# Altium PCB 5VPS.PcbDoc
Units mil, origin at the board's own origin, x right, y up, seen from the top; angles counter-clockwise.
Board outline 1875 x 2397.17 mil, 2 copper layers (Top Layer, Bottom Layer (GND)); 13 components, 6 nets, 31 pads, 8 vias.
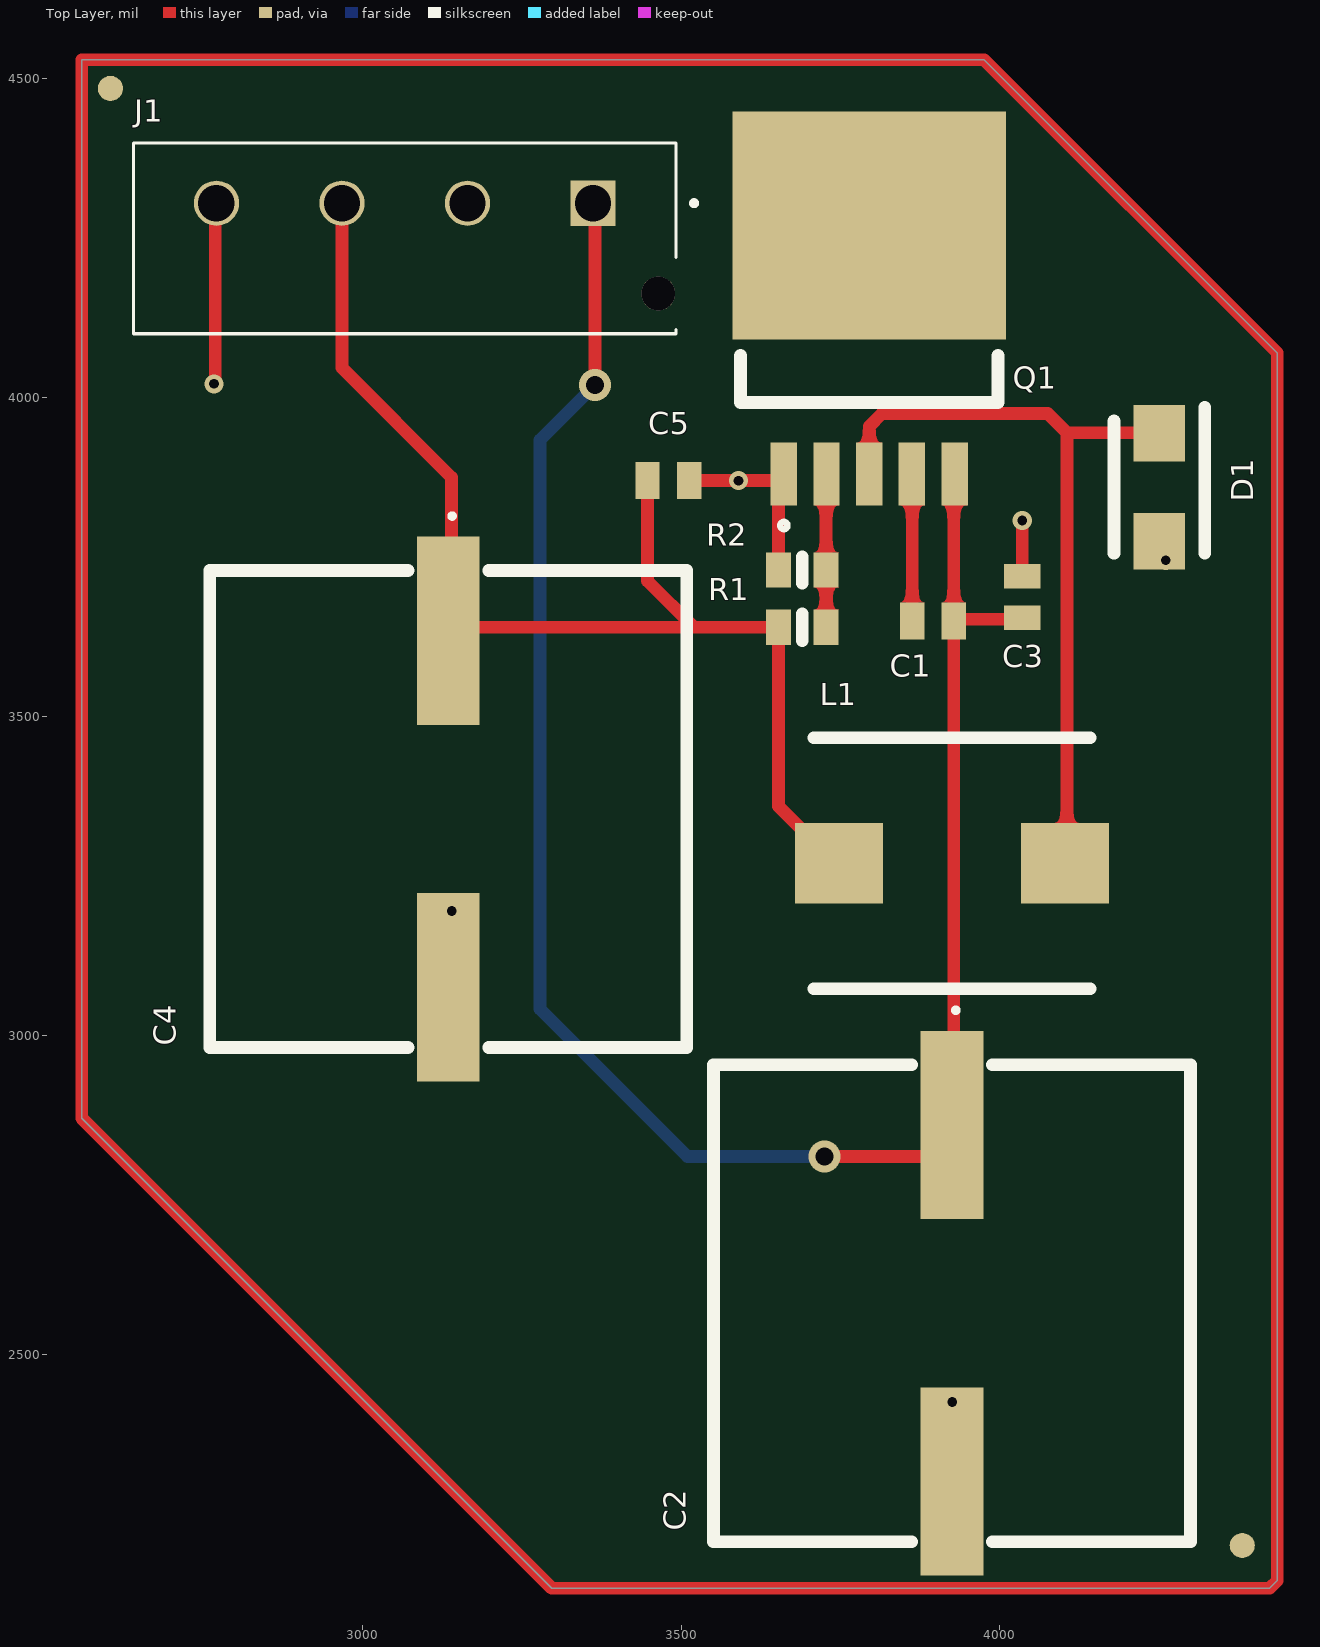
[diagram p0: Top Layer view]
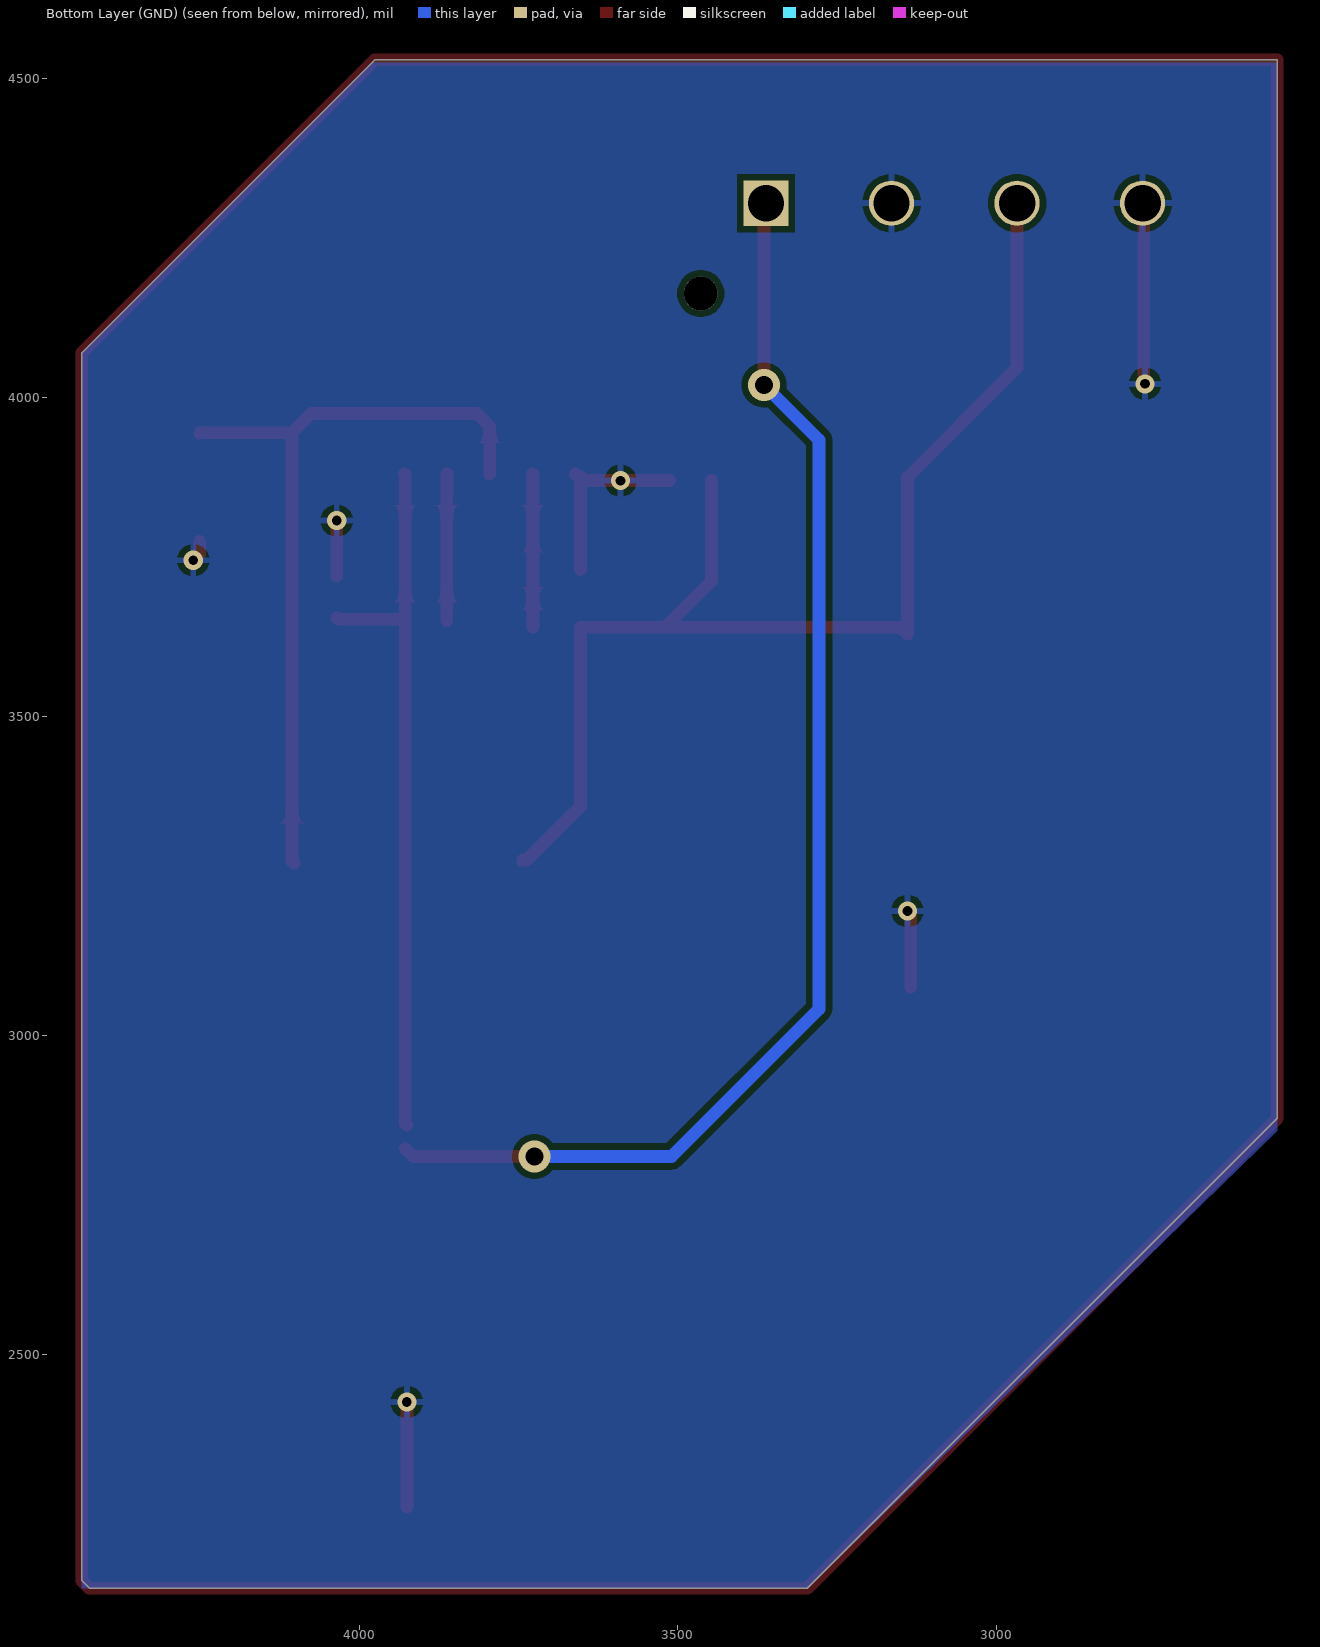
[diagram p1: Bottom Layer (GND) view, seen from below]
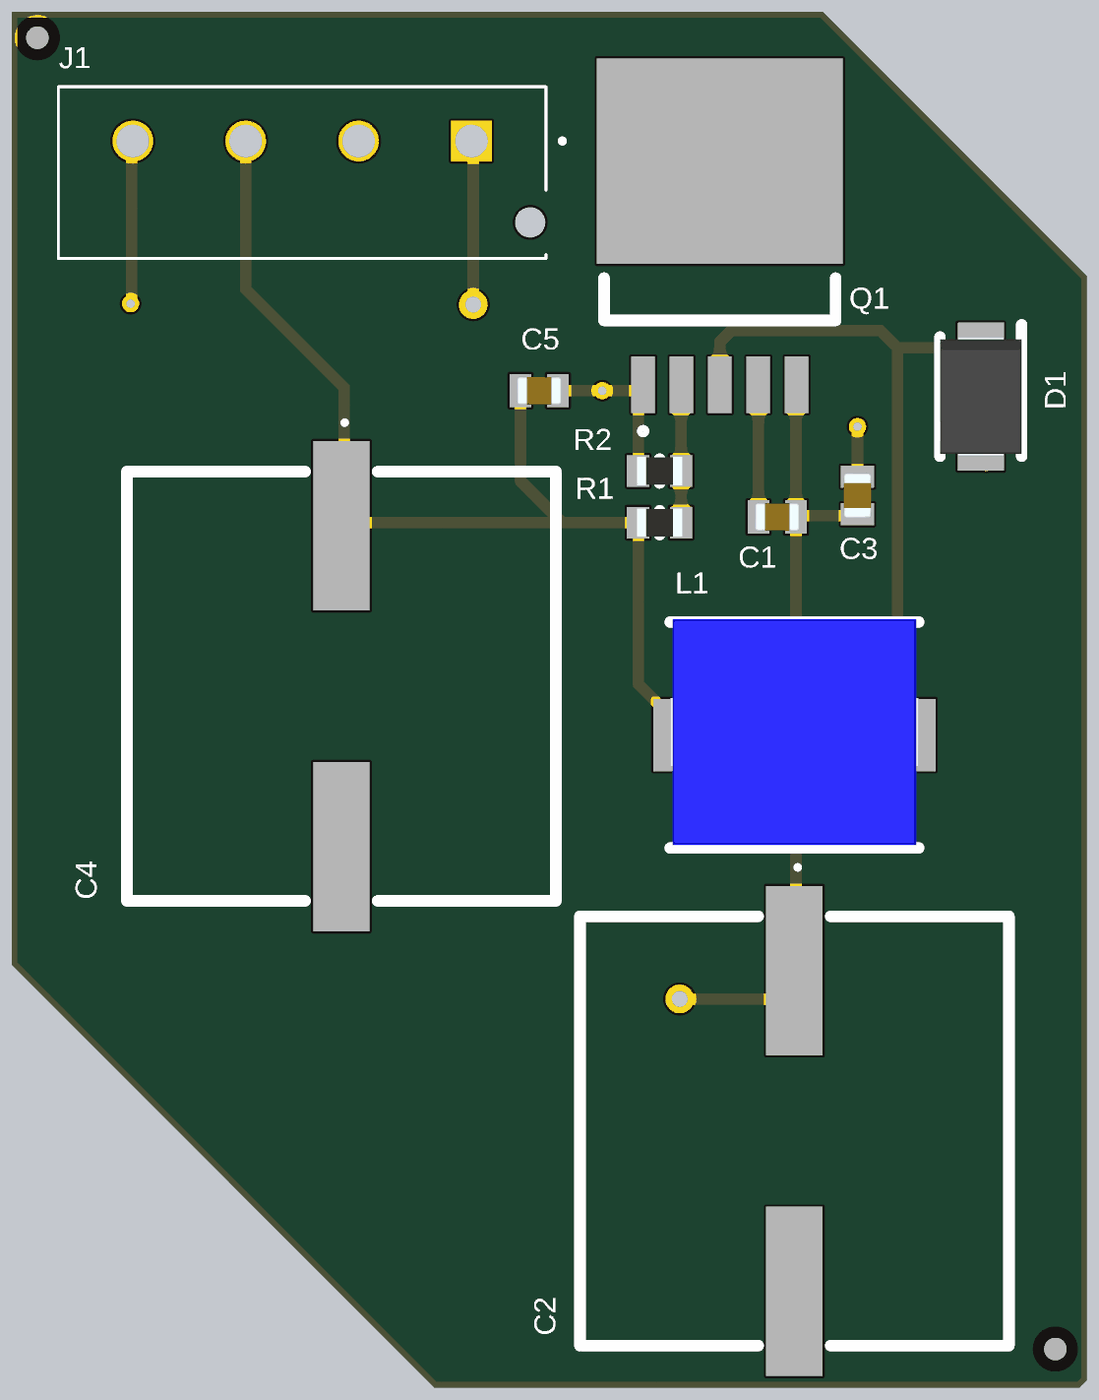
[diagram p2: 3D render of the assembled board from above, using the file's embedded part models]

## Layer stack, top to bottom
Top Solder: solder mask 0.4, Solder Resist, Dk 3.5
Top Layer: signal copper 1.378
Dielectric 1: dielectric 12.6, FR-4, Dk 4.8
Bottom Layer (GND): signal copper 1.378
Bottom Solder: solder mask 0.4, Solder Resist, Dk 3.5

## Board outline
2560,2870 3297.17,2132.83 4422.83,2132.83 4435,2145 4435,4070 3975,4530 2560,4530

## Design rules (kind name [scope] priority, off if disabled: settings)
Clearance [All] p1: gap=10 ignorepadtopadclearanceinfootprint=FALSE except(0: Arc-Hole Track-Hole SMDPad-Hole THPad-Hole Via-Hole Fill-Hole Poly-Hole Region-Hole Text-Hole)
PolygonConnect [All] p1: connectstyle=Relief reliefconductorwidth=10 reliefentries=4 polygonreliefangle="90 Angle" airgapwidth=10
RoutingVias [All] p1: holewidth=28 width=50 viastyle="Through Hole" minholewidth=28 minwidth=50 maxholewidth=28 maxwidth=50
SilkToSolderMaskClearance [IsText] p1: minsilkscreentomaskgap=10 clearancetoexposedcopper=TRUE
SolderMaskExpansion [All] p1: expansion=4 istentingtop=FALSE
Width [All] p1: maxlimit=35 minlimit=10 preferedwidth=10
29 further rules are at their usual default settings.

## Classes and differential pairs
component class 5VPS: C1 C2 C3 C4 C5 D1 J1 L1 Q1 R1 R2

## Components (designator, comment, footprint, x,y, rotation, side; value= is the part's Value field where it differs from the comment)
C1 "1uF" CAPC2012X145N 3895,3650 r0 top
C2 "220uF" FKV(K16) 3925,2580 r270 top
C3 "1uF" CAPC2012X145N 4035,3687.32 r270 top
C4 "220uF" FKV(K16) 3135,3355 r270 top
C5 "1uF" CAPC2012X145N 3480,3870 r180 top
D1 "SS54B" DIOM5336X244N 4250,3859.65 r270 top
J1 "1376384-1" TE_1376384-1 3361.85,4305 r180 top
L1 "47uH" INDPM110100X400N 3925,3270 r180 top
Q1 "XL4015" TO-263-5 3795,4352.68 r0 top
R1 "10k" RESC2012X65N 3690,3640 r180 top
R2 "3k3" RESC2012X65N 3690,3730 r0 top
? "Comment" FIDUCIAL 2605,4485 r0 top
? "Comment" FIDUCIAL 4380,2200 r0 top

## Footprints (in the part's own frame and the unit in brackets; to place one, negate y for a bottom-side part, rotate by r counter-clockwise, add the part's x,y. Pads: shape width x height; smd on the part's side, far side on the other; paste and mask are expansions set on the pad)
CAPC2012X145N [mm]
  rect 0.97x1.47 smd: 1(-0.83,0) 2(0.83,0)
  body extent -1,-0.63 1,0.62, height 1.45
DIOM5336X244N [mm]
  rect 2.25x2.05 smd: 1(-2.15,0) 2(2.15,0)
  silkscreen extent -3.18,-1.81 2.64,1.81, body extent -2.64,-1.81 2.64,1.81, height 2.44
FIDUCIAL [mm] "FIDUCIAL 1mm SOLDER MASK 2mm KEEP OUT 2mm"
  round 1 smd mask+0.5: 0(0,0)
FKV(K16) [mm]
  rect 7.5x2.5 smd: 1(-7.1,0) 2(7.1,0)
  silkscreen extent -11.75,-9.5 9.5,9.5
INDPM110100X400N [mm]
  rect 3.5x3.2 smd: 1(-4.5,0) 2(4.5,0)
  silkscreen extent -5.5,-5 5.5,5, body extent -5.5,-5.13 5.5,4.87, height 4
RESC2012X65N [mm]
  rect 1x1.4 smd: 1(-0.95,0) 2(0.95,0)
  silkscreen extent 0,-0.53 0,0.53, body extent -1,-0.62 1,0.62, height 0.65
TE_1376384-1 [mm]
  rect 1.8x1.8 hole 1.45: 1(0,0)
  round 1.8 hole 1.45: 2(5,0) 3(10,0) 4(15,0)
  round 1.35 hole 1.35 unplated: ""(-2.6,3.6)
  silkscreen extent -4.13,-2.4 18.3,5.2
TO-263-5 [mm]
  rect 1.05x2.5 smd: 1(-3.4,-12) 2(-1.7,-12) 3(0,-12) 4(1.7,-12) 5(3.4,-12)
  rect 10.9x9.1 smd: 6(0,-2.1)
  silkscreen extent -5.13,-14.19 5.13,-7.28

## Part data
C1 C3 C5: library part GRM21BR71H104JA01L, "Multilayer Ceramic Capacitors MLCC - SMD/SMT 0805 0.1uF 50volts X7R 5%", Manufacturer_Name="Murata Electronics", Arrow Part Number=GRM21BR71H104JA01L, Arrow Price/Stock=https://www.arrow.com/en/products/grm21br71h104ja01l/murata-manufacturing, Datasheet Link=http://www.murata.com/~/media/webrenewal/support/library/catalog/products/capacitor/mlcc/c02e.pdf, Geometry.Height=1.45mm, Manufacturer_Part_Number=GRM21BR71H104JA01L
C2 C4: library part EEVFK2A221M, "Ecap 220uF 100V K16 case Panasonic Aluminium Electrolytic Capacitor 220F 100 V dc 18mm Surface Mount series FK SMD lifetime 5000h", Manufacturer_Name=Panasonic, RS Part Number=5370679, Allied Price/Stock=https://www.alliedelec.com/panasonic-eev-fk2a221m/70257853/, Allied_Number=70257853, Arrow Part Number=EEVFK2A221M, Arrow Price/Stock=https://www.arrow.com/en/products/eevfk2a221m/panasonic, Datasheet Link=http://uk.rs-online.com/web/p/products/5370679, Manufacturer_Part_Number=EEVFK2A221M, RS Price/Stock=http://uk.rs-online.com/web/p/products/5370679
D1: "HY Electronic Corp SS54B, SMT Rectifier Schottky Diode, 40V 5A, 2-Pin SMB", Manufacturer_Name="HY Electronic Corp", RS Part Number=1711461, Arrow Part Number=SS54B, Arrow Price/Stock=http://uk.rs-online.com/web/p/products/1711461, Datasheet Link=http://docs-europe.electrocomponents.com/webdocs/14bb/0900766b814bbf92.pdf, Geometry.Height=2.44mm, Manufacturer_Part_Number=SS54B, RS Price/Stock=http://uk.rs-online.com/web/p/products/1711461
J1: "4 Position Single Row 5 mm Pitch Pressfit Wire-Board Header Receptacle Assembly", Package=None, Availability=Unavailable, MF="TE Connectivity", MP=1376384-1, Price=None, SnapEDA_Link=https://www.snapeda.com/parts/1376384-1/TE%20Connectivity%20AMP%20Connectors/view-part/2371909/?ref=snap, TE_purchase_URL=https://www.te.com/usa-en/product-1376384-1.html?te_bu=Cor&te_type=disp&te_campaign=seda_glo_cor-seda-global-disp-prtnr-fy19-seda-model-bom-cta_sma-317_1&elqCampaignId=32493
L1: library part SRP1038A-470M, "Inductor SMD shielded AEC-Q200 47uH Bourns SRP1038A Series Shielded Wire-wound SMD Inductor with a Carbonyl Powder Core, 47 H 20% 3A Idc", Manufacturer_Name=Bourns, RS Part Number=1728637, Allied Price/Stock=https://www.alliedelec.com/bourns-srp1038a-470m/70377524/, Allied_Number=70377524, Arrow Part Number=SRP1038A-470M, Arrow Price/Stock=https://www.arrow.com/en/products/srp1038a-470m/bourns, Datasheet Link=http://uk.rs-online.com/web/p/products/8193337, Geometry.Height=4mm, Manufacturer_Part_Number=SRP1038A-470M, RS Price/Stock=http://uk.rs-online.com/web/p/products/1728637
Q1: library part AP1506-50K5G-13, "DC / DC converters in the housing TO263-5L, Voltage Regulator, Buck Converter, Switching Regulator", Manufacturer_Name="Diodes Inc.", Arrow Part Number=AP1506-50K5G-13, Arrow Price/Stock=https://www.arrow.com/en/products/ap1506-50k5g-13/diodes-incorporated, Datasheet Link=https://www.diodes.com/assets/Datasheets/AP1506.pdf, Manufacturer_Part_Number=AP1506-50K5G-13
R1 R2: library part KTR10EZPF5103, "Thick Film Resistors - SMD 0805 510Kohm 1% High VoltageAEC-Q200", Manufacturer_Name="ROHM Semiconductor", Arrow Part Number=KTR10EZPF5103, Arrow Price/Stock=https://www.arrow.com/en/products/ktr10ezpf5103/rohm-semiconductor, Datasheet Link=http://rohmfs.rohm.com/en/products/databook/datasheet/passive/resistor/chip_resistor/ktr.pdf, Geometry.Height=0.65mm, Manufacturer_Part_Number=KTR10EZPF5103

## Via types
v1: diameter 30, hole 15, Top Layer to Bottom Layer (GND), 6 vias
v2: diameter 50, hole 28, Top Layer to Bottom Layer (GND), 2 vias

## Nets (pads, with @x,y where several pads share a name; then routed paths per layer and width w, separated by ;. In a path a pad name is that pad's centre, name@x,y a point inside that pad or via, vN(x,y) a via of type N, cw(c..) or ccw(c..) an arc to the next point about the centre after c; other vN are vias at no path point)
+5: C4.1 C5.2 J1.3 L1.2 R1.2 | length 1936.6
  Top Layer w10: L1.2@3742.83,3275 L1.2
  Top Layer w20: J1.3 2968.15,4046.85 3140,3875 3140,3629.53 3150.47,3640 3520,3640 ; C5.2 3447.32,3712.68 3520,3640 ; L1.2@3742.83,3275 3736.93,3275 3652.6,3359.33 R1.2 3520,3640
GND: C2.2 C3.1 C4.2 C5.1 D1.2 J1.2 J1.4 Q1.1 R2.1 | length 996.3
  Top Layer w20: v1(2767.5,4021.56) 2769.4,4023.46 2769.4,4310.06 J1.4@2770,4310.66 ; C4.2 3135,3190 v1(3140,3195) ; C5.1 3650.91,3870 Q1.1@3652.6,3871.69 ; Q1.1@3650.47,3875 3652.6,3872.87 Q1.1@3652.6,3871.69 ; R2.1 Q1.1@3652.6,3871.69 ; Q1.1 Q1.1@3652.6,3871.69 ; C2.2@3925,2260.47 v1(3925,2425) ; C3.1 v1(4035,3807.32) ; D1.2 4250,3755 v1(4260,3745)
  other v1: 3590,3870
NetC1_1: C1.1 Q1.4 | length 258.9
  Top Layer w20: Q1.4@3861.93,3851.69 Q1.4 3862.32,3879.84 C1.1
NetD1_1: D1.1 L1.1 Q1.3 | length 1228.6
  Top Layer w20: Q1.3 3795,3955 3815,3975 4075,3975 4105,3945 ; L1.1@4103.02,3270.86 L1.1 4105,3272.83 4105,3945 ; D1.1 4248.79,3945.5 4248.28,3945 4105,3945
NetQ1_2: Q1.2 R1.1 R2.2 | length 240.5
  Top Layer w20: R1.1 R2.2 3727.4,3879.57 Q1.2
VCC: C1.2 C2.1 C3.2 J1.1 Q1.5 | length 3189.2
  Top Layer w20: J1.1@3355,4298.72 J1.1@3360,4303.72 ; J1.1 3365,4301.85 v2(3365,4020) ; v2(3725,2810) 3915.47,2810 C2.1@3927.68,2822.2 ; C2.1 3927.68,2862.2 C1.2 ; Q1.5 3927.68,3879.06 C1.2 ; C3.2 4032.68,3652.32 3930,3652.32 C1.2
  Bottom Layer (GND) w20: v2(3365,4020) 3278.7,3933.7 3278.7,3041.3 3510,2810 v2(3725,2810)
pads on no net: ?.0 J1. Q1.6
copper on no net: | length 7835.9
  Top Layer w20: 2560,2870 3297.17,2132.83 4422.83,2132.83 4435,2145 4435,4070 3975,4530 2560,4530 2560,2870

## Polygon pours and split planes (outlines as drawn)
GND on Bottom Layer (GND) "GND Plane" (solid, pour order 0): 2560,4525.42 2560,2850 3297.17,2132.83 4435,2132.83 4435,4070 3979.58,4525.42